# EAGLE board VKeyVoltageKeypad-Panel-v10 (EAGLE 6.5.0)
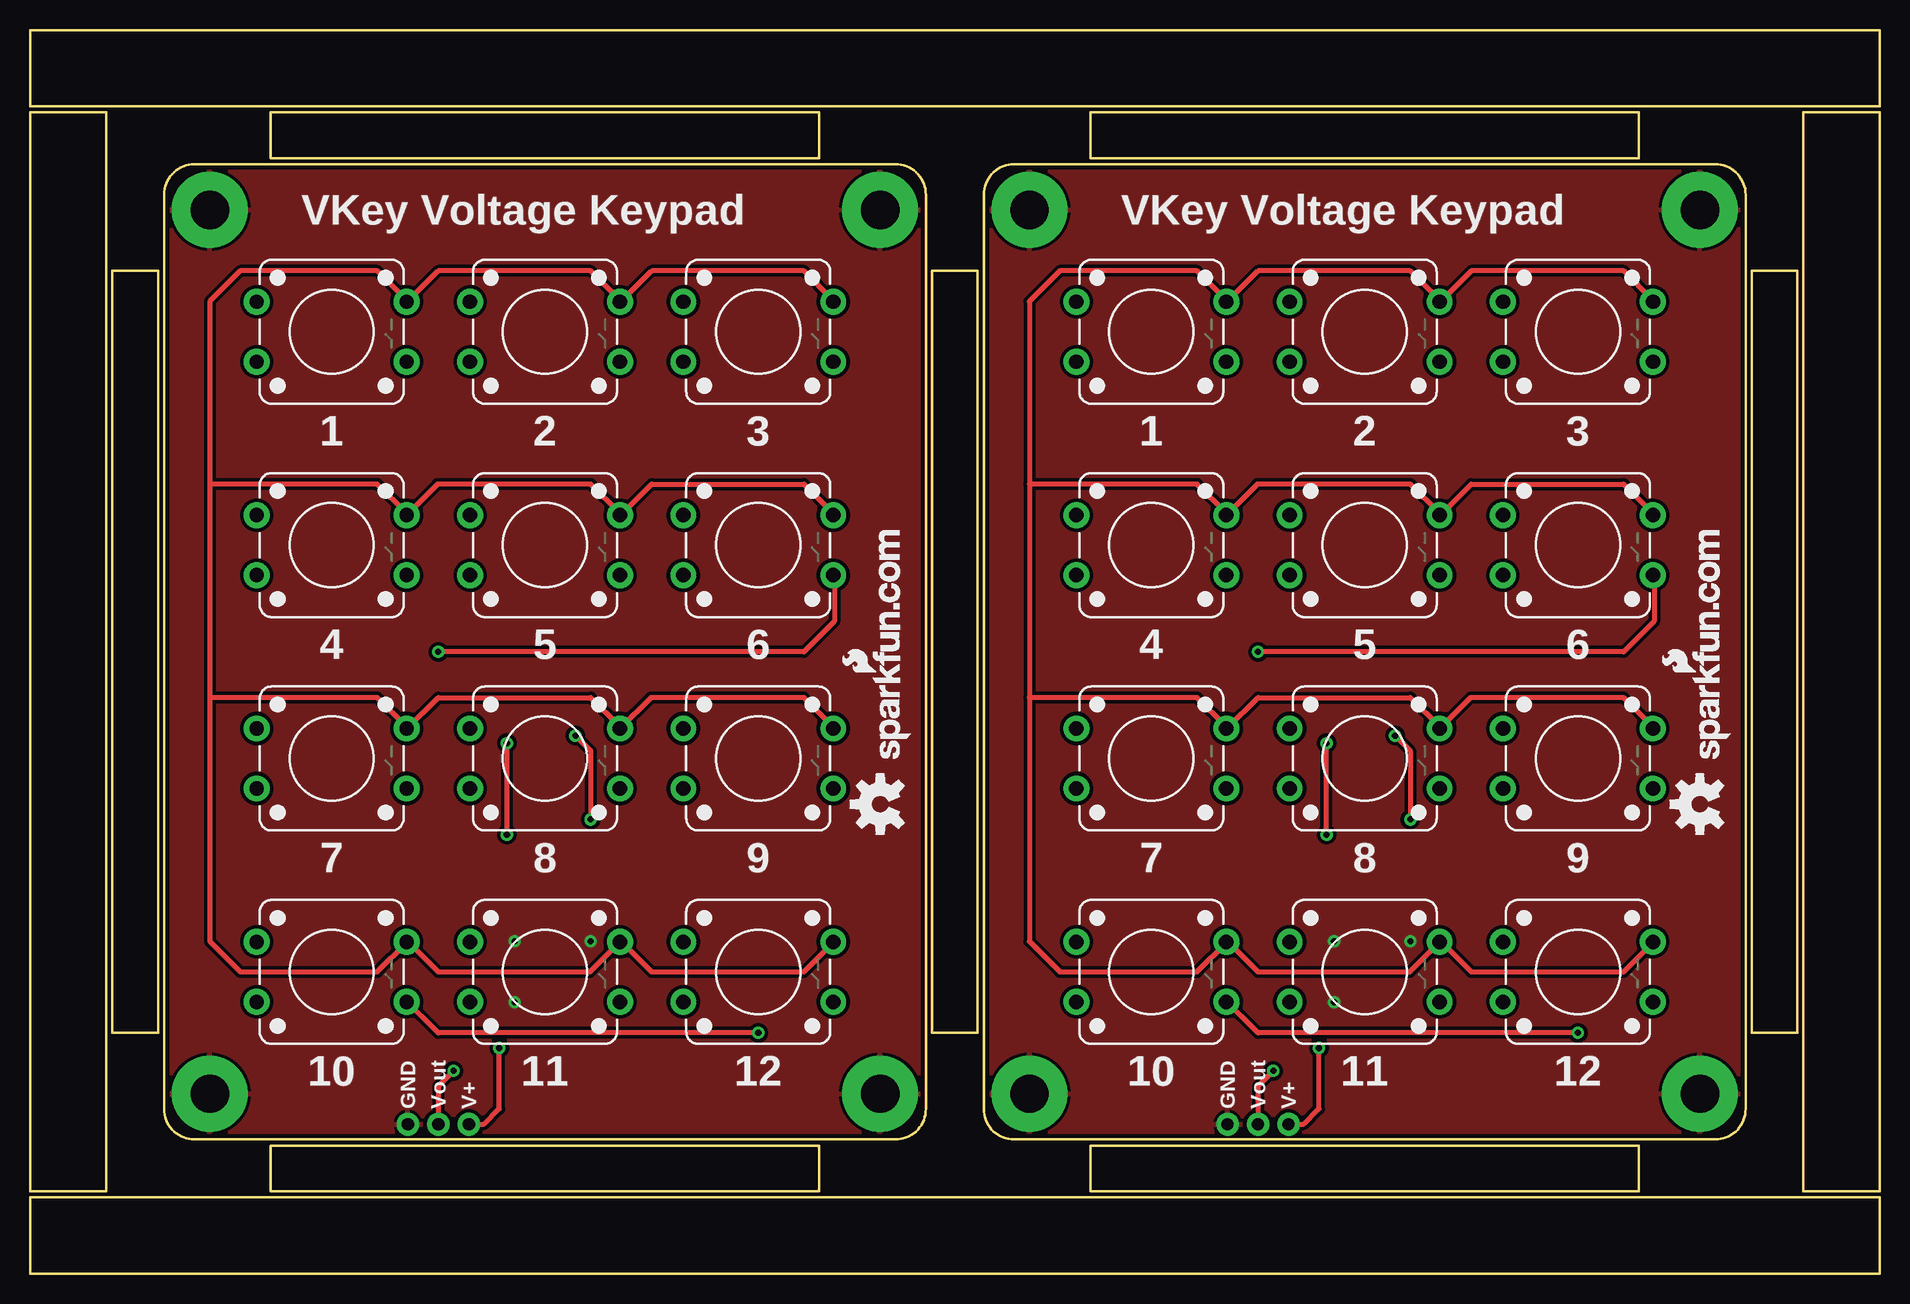
[diagram p0: board, top side]
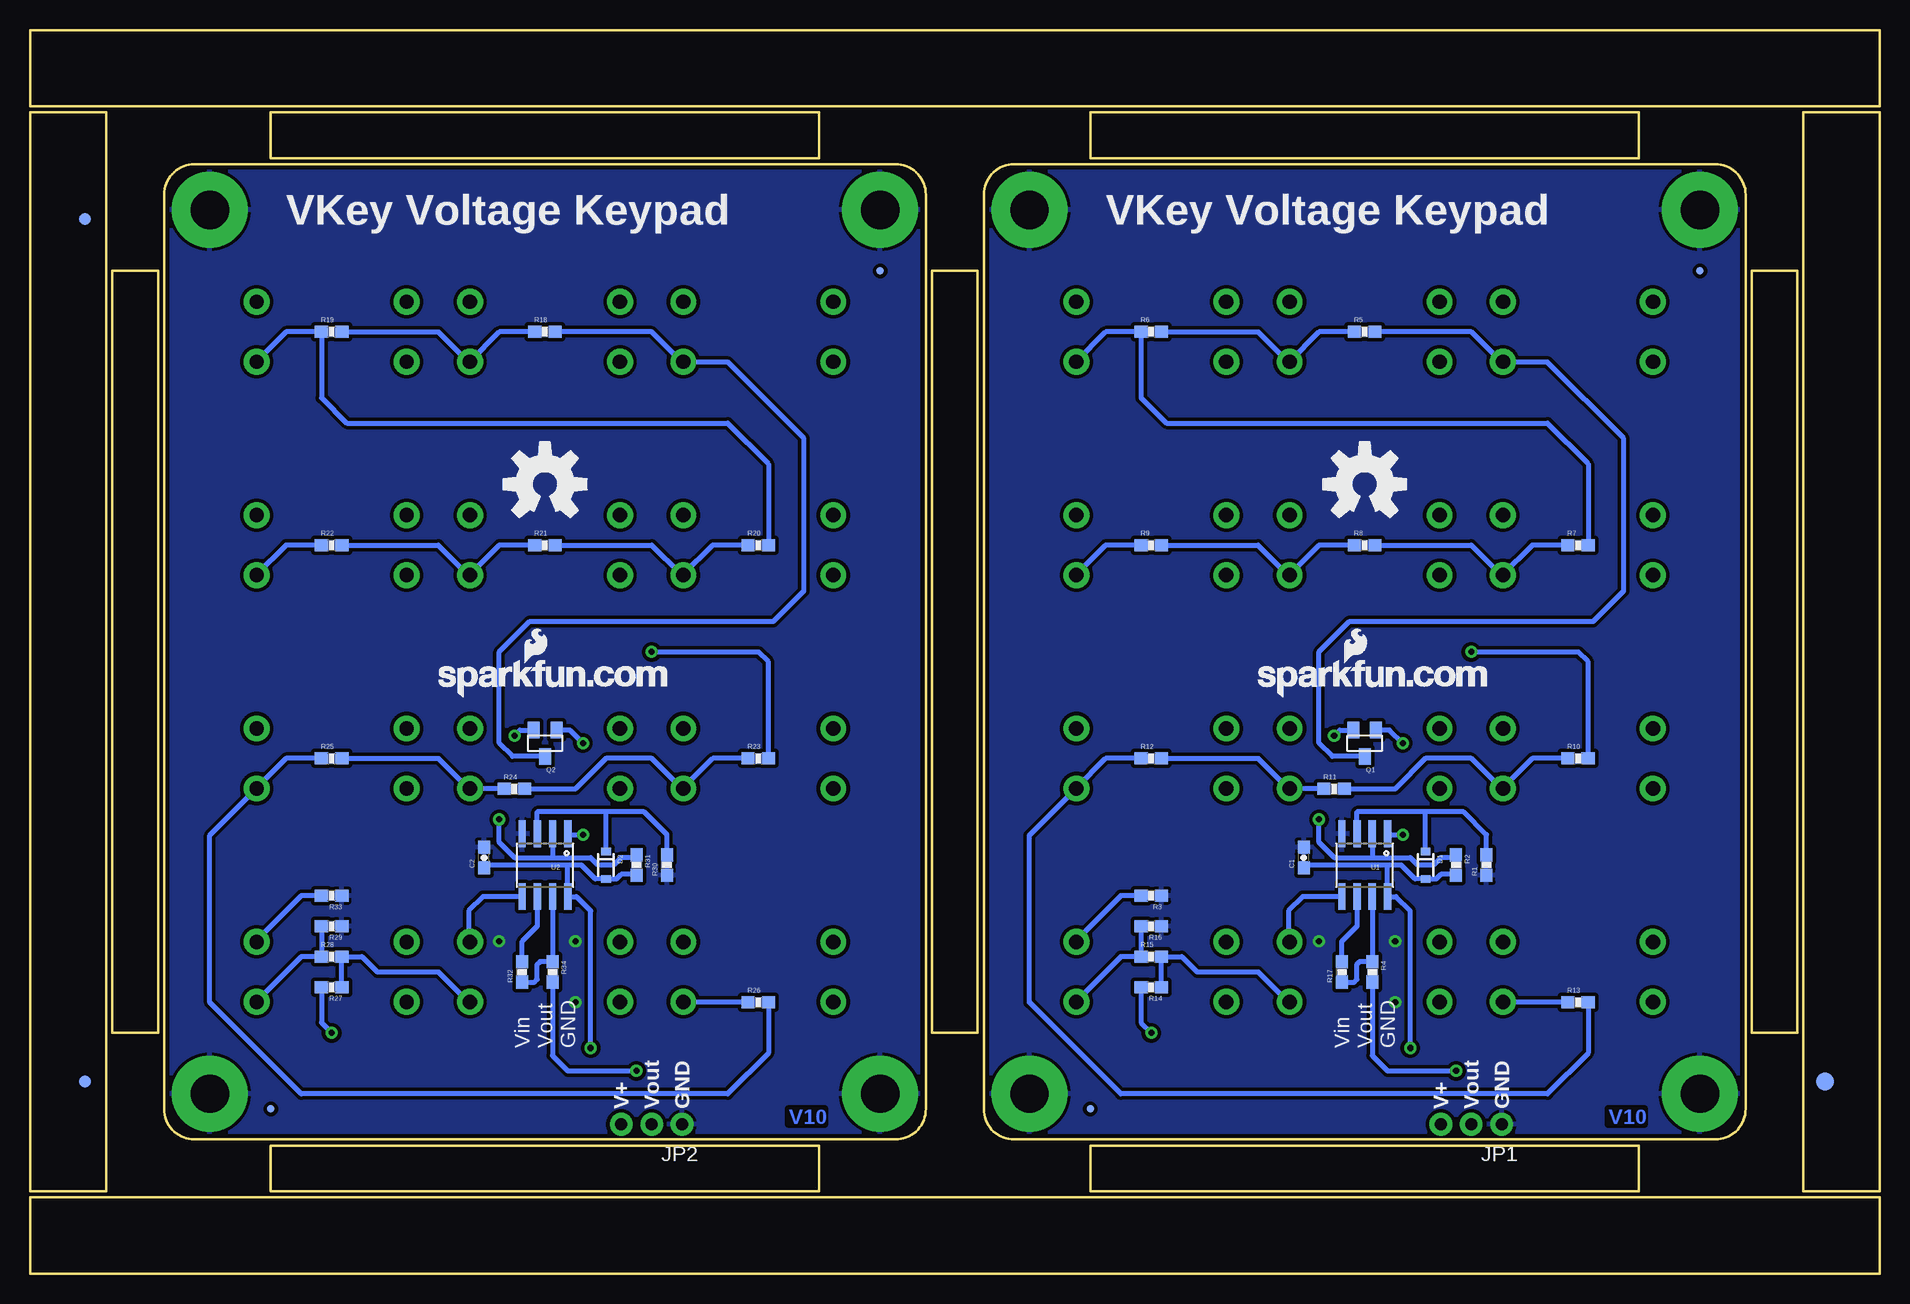
[diagram p1: board, bottom side, seen from below]

Size 154.18 x 103.63 mm. Coordinates in mm from the lower left corner, seen from the top.
Outline: 6.35,79.25 6.35,6.86 0,6.86 0,29.72
Outline: 154.18,79.25 154.18,6.86 147.83,6.86 147.83,29.72
Outline: 147.83,24.38 147.83,96.77 154.18,96.77 154.18,73.91
Outline: 0,24.38 0,96.77 6.35,96.77 6.35,73.91
Outline: 10.67,20.07 10.67,83.57 6.86,83.57 6.86,20.07 10.67,20.07
Outline: 65.79,10.67 20.07,10.67 20.07,6.86 65.79,6.86 65.79,10.67
Outline: 65.79,96.77 20.07,96.77 20.07,92.96 65.79,92.96 65.79,96.77
Outline: 78.99,20.07 78.99,83.57 75.18,83.57 75.18,20.07 78.99,20.07
Outline: 147.32,20.07 147.32,83.57 143.51,83.57 143.51,20.07 147.32,20.07
Outline: 134.11,10.67 88.39,10.67 88.39,6.86 134.11,6.86 134.11,10.67
Outline: 134.11,96.77 88.39,96.77 88.39,92.96 134.11,92.96 134.11,96.77
Outline: 0,6.35 0,0 154.18,0 154.18,6.35 0,6.35
Outline: 154.18,97.28 154.18,103.63 0,103.63 0,97.28 154.18,97.28
Outline: 11.18,89.92 11.18,13.72 arc90 13.72,11.18 72.14,11.18 arc90 74.68,13.72 74.68,89.92 arc90 72.14,92.46 13.72,92.46 arc90 11.18,89.92
Outline: 79.5,89.92 79.5,13.72 arc90 82.04,11.18 140.46,11.18 arc90 143,13.72 143,89.92 arc90 140.46,92.46 82.04,92.46 arc90 79.5,89.92
Copper layers (1*16): Top 0.035mm / dielectric 1.5mm / Bottom 0.035mm
Design rules "default": minimum track width 7mil, minimum drill 15mil, track to track 8mil, track to pad 8mil, pad to pad 8mil, via to via 8mil, smd to smd 8mil, copper to edge 8mil, drill to drill 8mil, minimum pad ring 12mil, minimum via ring 10mil, stop-mask expansion 4mil, vias tented up to drill 20mil, thermal gap 10mil

## Footprints (pad centres in the part's own frame; a part is rotated, then mirrored left to right if it is on the bottom)
0603-CAP = smd 1.1 x 1: 1 -0.85,0; 2 0.85,0
SOD-323 = smd 0.63 x 0.83: 1 -1.15,0; 2 1.15,0
FIDUCIAL-1.5X3 = smd 1.5 x 1.5: 1 0,0
FIDUCIAL-1X2.5 = smd 1 x 1: 1 0,0
MICRO-FIDUCIAL = smd 0.635 x 0.635: 1 0,0
1X03_NO_SILK = drill 1.016 pad 1.88: 1 0,0; 2 2.54,0; 3 5.08,0
SOT23 = smd 1 x 1.4: 1 -0.95,-1.1; 2 0.95,-1.1; 3 0,1.1
0603-RES = smd 1.1 x 1: 1 -0.85,0; 2 0.85,0
TACTILE-PTH-12MM = drill 1.2 pad 2.159: 1 6.25,-2.5; 2 -6.25,-2.5; 3 6.25,2.5; 4 -6.25,2.5
STANDOFF-ELECTRICAL = drill 3.2 pad 6.35: P1 0,0
SO08 = smd 0.61 x 2.21: 1 -1.905,-2.616; 2 -0.635,-2.616; 3 0.635,-2.616; 4 1.905,-2.616; 5 1.905,2.616; 6 0.635,2.616; 7 -0.635,2.616; 8 -1.905,2.616

## Placement (x,y rotation side)
C1  .01uF  [0603-CAP]  48.01,34.67 90 bottom
C2  .01uF  [0603-CAP]  116.33,34.67 90 bottom
D1  BAS16  [SOD-323]  37.85,34.04 270 bottom
D2  BAS16  [SOD-323]  106.17,34.04 270 bottom
E$1  [FIDUCIAL-1.5X3]  4.57,16 0 bottom
E$2  [FIDUCIAL-1X2.5]  149.61,16 0 bottom
E$3  [FIDUCIAL-1X2.5]  149.61,87.88 0 bottom
FID1  FIDUCIALUFIDUCIAL  [MICRO-FIDUCIAL]  65.79,13.72 0 bottom
FID2  FIDUCIALUFIDUCIAL  [MICRO-FIDUCIAL]  14.99,83.57 0 bottom
FID3  FIDUCIALUFIDUCIAL  [MICRO-FIDUCIAL]  134.11,13.72 0 bottom
FID4  FIDUCIALUFIDUCIAL  [MICRO-FIDUCIAL]  83.31,83.57 0 bottom
JP1  POWER & OUTPUT  [1X03_NO_SILK]  31.5,12.45 180 bottom
JP2  POWER & OUTPUT  [1X03_NO_SILK]  99.82,12.45 180 bottom
LOGO1  LOGO-SFENEW  [SFE-NEW-WEBLOGO]  73.41,42.93 90 top
LOGO2  LOGO-SFENEW  [SFE-NEW-WEBLOGO]  51.82,48.01 0 bottom
LOGO3  OSHW-LOGOM  [OSHW-LOGO-M]  70.87,39.12 90 top
LOGO4  OSHW-LOGOL  [OSHW-LOGO-L]  42.93,65.79 0 bottom
LOGO5  LOGO-SFENEW  [SFE-NEW-WEBLOGO]  141.73,42.93 90 top
LOGO6  LOGO-SFENEW  [SFE-NEW-WEBLOGO]  120.14,48.01 0 bottom
LOGO7  OSHW-LOGOM  [OSHW-LOGO-M]  139.19,39.12 90 top
LOGO8  OSHW-LOGOL  [OSHW-LOGO-L]  111.25,65.79 0 bottom
Q1  MMBT3906  [SOT23]  42.93,44.2 180 bottom
Q2  MMBT3906  [SOT23]  111.25,44.2 180 bottom
R1  10k  [0603-RES]  32.77,34.04 90 bottom
R2  1k  [0603-RES]  35.31,34.04 270 bottom
R3  1meg  [0603-RES]  60.71,31.5 180 bottom
R4  100  [0603-RES]  42.29,25.15 270 bottom
R5  330  [0603-RES]  42.93,78.49 0 bottom
R6  330  [0603-RES]  60.71,78.49 0 bottom
R7  330  [0603-RES]  25.15,60.71 0 bottom
R8  330  [0603-RES]  42.93,60.71 0 bottom
R9  330  [0603-RES]  60.71,60.71 0 bottom
R10  330  [0603-RES]  25.15,42.93 0 bottom
R11  330  [0603-RES]  45.47,40.39 0 bottom
R12  330  [0603-RES]  60.71,42.93 0 bottom
R13  330  [0603-RES]  25.15,22.61 0 bottom
R14  330  [0603-RES]  60.71,23.88 180 bottom
R15  330  [0603-RES]  60.71,26.42 0 bottom
R16  330  [0603-RES]  60.71,28.96 180 bottom
R17  1k  [0603-RES]  44.83,25.15 90 bottom
R18  330  [0603-RES]  111.25,78.49 0 bottom
R19  330  [0603-RES]  129.03,78.49 0 bottom
R20  330  [0603-RES]  93.47,60.71 0 bottom
R21  330  [0603-RES]  111.25,60.71 0 bottom
R22  330  [0603-RES]  129.03,60.71 0 bottom
R23  330  [0603-RES]  93.47,42.93 0 bottom
R24  330  [0603-RES]  113.79,40.39 0 bottom
R25  330  [0603-RES]  129.03,42.93 0 bottom
R26  330  [0603-RES]  93.47,22.61 0 bottom
R27  330  [0603-RES]  129.03,23.88 180 bottom
R28  330  [0603-RES]  129.03,26.42 0 bottom
R29  330  [0603-RES]  129.03,28.96 180 bottom
R30  10k  [0603-RES]  101.09,34.04 90 bottom
R31  1k  [0603-RES]  103.63,34.04 270 bottom
R32  1k  [0603-RES]  113.16,25.15 90 bottom
R33  1meg  [0603-RES]  129.03,31.5 180 bottom
R34  100  [0603-RES]  110.62,25.15 270 bottom
S1  SWITCH-MOMENTARY-212MM  [TACTILE-PTH-12MM]  25.15,78.49 0 top
S2  SWITCH-MOMENTARY-212MM  [TACTILE-PTH-12MM]  42.93,78.49 0 top
S3  SWITCH-MOMENTARY-212MM  [TACTILE-PTH-12MM]  60.71,78.49 0 top
S4  SWITCH-MOMENTARY-212MM  [TACTILE-PTH-12MM]  25.15,60.71 0 top
S5  SWITCH-MOMENTARY-212MM  [TACTILE-PTH-12MM]  42.93,60.71 0 top
S6  SWITCH-MOMENTARY-212MM  [TACTILE-PTH-12MM]  60.71,60.71 0 top
S7  SWITCH-MOMENTARY-212MM  [TACTILE-PTH-12MM]  25.15,42.93 0 top
S8  SWITCH-MOMENTARY-212MM  [TACTILE-PTH-12MM]  42.93,42.93 0 top
S9  SWITCH-MOMENTARY-212MM  [TACTILE-PTH-12MM]  60.71,42.93 0 top
S10  SWITCH-MOMENTARY-212MM  [TACTILE-PTH-12MM]  25.15,25.15 0 top
S11  SWITCH-MOMENTARY-212MM  [TACTILE-PTH-12MM]  42.93,25.15 0 top
S12  SWITCH-MOMENTARY-212MM  [TACTILE-PTH-12MM]  60.71,25.15 0 top
S13  STANDOFF_ELECTRICAL  [STANDOFF-ELECTRICAL]  70.87,88.65 0 top
S14  STANDOFF_ELECTRICAL  [STANDOFF-ELECTRICAL]  70.87,14.99 0 top
S15  STANDOFF_ELECTRICAL  [STANDOFF-ELECTRICAL]  14.99,14.99 0 top
S16  STANDOFF_ELECTRICAL  [STANDOFF-ELECTRICAL]  14.99,88.65 0 top
S17  SWITCH-MOMENTARY-212MM  [TACTILE-PTH-12MM]  93.47,78.49 0 top
S18  SWITCH-MOMENTARY-212MM  [TACTILE-PTH-12MM]  111.25,78.49 0 top
S19  SWITCH-MOMENTARY-212MM  [TACTILE-PTH-12MM]  129.03,78.49 0 top
S20  SWITCH-MOMENTARY-212MM  [TACTILE-PTH-12MM]  93.47,60.71 0 top
S21  SWITCH-MOMENTARY-212MM  [TACTILE-PTH-12MM]  111.25,60.71 0 top
S22  SWITCH-MOMENTARY-212MM  [TACTILE-PTH-12MM]  129.03,60.71 0 top
S23  SWITCH-MOMENTARY-212MM  [TACTILE-PTH-12MM]  93.47,42.93 0 top
S24  SWITCH-MOMENTARY-212MM  [TACTILE-PTH-12MM]  111.25,42.93 0 top
S25  SWITCH-MOMENTARY-212MM  [TACTILE-PTH-12MM]  129.03,42.93 0 top
S26  SWITCH-MOMENTARY-212MM  [TACTILE-PTH-12MM]  93.47,25.15 0 top
S27  SWITCH-MOMENTARY-212MM  [TACTILE-PTH-12MM]  111.25,25.15 0 top
S28  SWITCH-MOMENTARY-212MM  [TACTILE-PTH-12MM]  129.03,25.15 0 top
S29  STANDOFF_ELECTRICAL  [STANDOFF-ELECTRICAL]  139.19,88.65 0 top
S30  STANDOFF_ELECTRICAL  [STANDOFF-ELECTRICAL]  139.19,14.99 0 top
S31  STANDOFF_ELECTRICAL  [STANDOFF-ELECTRICAL]  83.31,14.99 0 top
S32  STANDOFF_ELECTRICAL  [STANDOFF-ELECTRICAL]  83.31,88.65 0 top
U1  LMV358  [SO08]  42.93,34.04 180 bottom
U2  LMV358  [SO08]  111.25,34.04 180 bottom

## Library data of the parts
C1 C2 = SparkFun-Capacitors; PROD_ID: CAP-00867; VALUE: 10nF
D1 D2 = SparkFun-DiscreteSemi; PROD_ID: DIO-09646
E$1-E$3 FID1-FID4 LOGO1-LOGO8 = SparkFun-Aesthetics
JP1 JP2 = SparkFun-Connectors
Q1 Q2 = SparkFun-DiscreteSemi; PROD_ID: TRANS-08052
R1 R30 = SparkFun-Resistors; PROD_ID: RES-00824; VALUE: 10K
R2 R17 R31 R32 = SparkFun-Resistors; PROD_ID: RES-07856; VALUE: 1K
R3 R33 = SparkFun-Resistors; PROD_ID: RES-07868; VALUE: 1M
R4 R34 = SparkFun-Resistors; PROD_ID: RES-07863
R5-R16 R18-R29 = SparkFun-Resistors; PROD_ID: RES-00818
S1-S12 S17-S28 = SparkFun-Electromechanical; PROD_ID: SWCH-09185
S13-S16 S29-S32 = SparkFun-Electromechanical
U1 U2 = SparkFun-AnalogIC; PROD_ID: IC-09657

## Nets
5V: C1.1 D1.2 JP1.3 R2.2 U1.8
5V1: C2.1 D2.2 JP2.3 R31.2 U2.8
GND: C1.2 JP1.1 R1.1 R3.1 R16.1 S13.P1 S14.P1 S15.P1 S16.P1 U1.4
GND1: C2.2 JP2.1 R29.1 R30.1 R33.1 S29.P1 S30.P1 S31.P1 S32.P1 U2.4
N$1: D1.1 R1.2 U1.3
N$2: Q1.1 U1.1
N$3: R3.2 S1.3 S2.3 S3.3 S4.3 S5.3 S6.3 S7.3 S8.3 S9.3 S10.3 S11.3 S12.3 U1.5
N$4: R14.1 R15.2 S11.1
N$5: Q1.2 R2.1 U1.2
N$6: Q1.3 R5.2 S1.1
N$7: R5.1 R6.2 S2.1
N$8: R6.1 R7.2 S3.1
N$9: R7.1 R8.2 S4.1
N$10: R8.1 R9.2 S5.1
N$11: R9.1 R10.2 S6.1
N$12: R10.1 R11.2 S7.1
N$13: R11.1 R12.2 S8.1
N$14: R12.1 R13.2 S9.1
N$15: R13.1 R14.2 S10.1
N$16: R15.1 R16.2 S12.1
N$17: R4.1 R17.1 U1.7
N$18: R17.2 U1.6
N$19: D2.1 R30.2 U2.3
N$20: Q2.2 R31.1 U2.2
N$21: Q2.3 R18.2 S17.1
N$22: R18.1 R19.2 S18.1
N$23: R19.1 R20.2 S19.1
N$24: R20.1 R21.2 S20.1
N$25: R21.1 R22.2 S21.1
N$26: R22.1 R23.2 S22.1
N$27: R24.1 R25.2 S24.1
N$28: R25.1 R26.2 S25.1
N$29: R26.1 R27.2 S26.1
N$30: R28.1 R29.2 S28.1
N$31: R27.1 R28.2 S27.1
N$32: Q2.1 U2.1
N$33: R33.2 S17.3 S18.3 S19.3 S20.3 S21.3 S22.3 S23.3 S24.3 S25.3 S26.3 S27.3 S28.3 U2.5
N$34: R23.1 R24.2 S23.1
N$35: R32.1 R34.1 U2.7
N$36: R32.2 U2.6
VOUT: JP1.2 R4.2
VOUT1: JP2.2 R34.2

## Tracks (layer width: path | path; a pad name or v marks a point on that pad's centre or on a via)
5V  (via drill 0.51)
  Top 0.406: JP1.3 37.85,12.45 39.12,13.72 v39.12,18.8
  Bottom 0.406: 41.02,34.04 47.79,34.04 C1.1 | v39.12,18.8 39.12,30.23 40.31,31.42 U1.8 41.02,34.04 | 41.02,34.04 39.88,34.04 38.73,32.89 D1.2 36.96,32.89 36.58,33.27 36.57,33.27 35.39,33.27 R2.2
5V1  (via drill 0.51)
  Top 0.406: JP2.3 106.17,12.45 107.44,13.72 v107.44,18.8
  Bottom 0.406: 109.35,34.04 116.12,34.04 C2.1 | v107.44,18.8 107.44,30.23 108.64,31.42 U2.8 109.35,34.04 | 109.35,34.04 108.2,34.04 107.05,32.89 D2.2 105.29,32.89 104.9,33.27 104.89,33.27 103.71,33.27 R31.2
GND  (via drill 0.51)
  other vias: 46.74,27.69 40.39,27.69 40.39,22.61
  pour Bottom (isolate 0.305): 71.35,11.81 14.51,11.81 arc-90 11.81,14.51 11.81,89.13 arc-90 14.51,91.82 71.35,91.82 arc-90 74.04,89.13 74.04,14.51 arc-90
  pour Top (isolate 0.305): 71.35,11.81 14.51,11.81 arc-90 11.81,14.51 11.81,89.13 arc-90 14.51,91.82 71.35,91.82 arc-90 74.04,89.13 74.04,14.51 arc-90
GND1  (via drill 0.51)
  other vias: 115.06,27.69 108.71,27.69 108.71,22.61
  pour Bottom (isolate 0.305): 139.67,11.81 82.83,11.81 arc-90 80.14,14.51 80.14,89.13 arc-90 82.83,91.82 139.67,91.82 arc-90 142.37,89.13 142.37,14.51 arc-90
  pour Top (isolate 0.305): 139.67,11.81 82.83,11.81 arc-90 80.14,14.51 80.14,89.13 arc-90 82.83,91.82 139.67,91.82 arc-90 142.37,89.13 142.37,14.51 arc-90
N$1
  Bottom 0.406: 37.85,38.48 34.67,38.48 32.77,36.58 R1.2 | 37.85,38.48 43.56,38.48 U1.3 | D1.1 37.85,38.48
N$2  (via drill 0.51)
  Top 0.406: v39.75,36.58 v39.75,44.2
  Bottom 0.406: v39.75,44.2 40.85,45.3 Q1.1 | U1.1 40.95,36.58 v39.75,36.58
N$3
  Top 0.406: S1.3 31.46,80.99 31.46,81.07 | 66.96,80.93 S3.3 66.96,81.13 64.52,83.57 51.82,83.57 49.24,80.99 S2.3 49.18,81.13 46.74,83.57 34.04,83.57 31.54,81.07 31.46,81.07 | S8.3 49.18,45.37 | 67.1,63.21 S6.3 66.96,63.35 64.52,65.79 51.82,65.79 49.24,63.21 S5.3 49.18,63.35 46.74,65.79 33.98,65.79 S4.3 31.4,63.35 28.96,65.79 14.99,65.79 | S8.3 49.18,45.57 46.74,48.01 34.04,48.01 31.46,45.43 S7.3 31.4,45.57 28.96,48.01 14.99,48.01 | 31.46,81.07 28.96,83.57 17.53,83.57 14.99,81.03 14.99,65.79 | 14.99,65.79 14.99,48.01 | 14.99,48.01 14.99,27.69 17.53,25.15 28.96,25.15 31.4,27.59 S10.3 31.4,27.79 34.04,25.15 46.68,25.15 S11.3 49.18,27.79 51.82,25.15 64.52,25.15 66.96,27.59 S12.3 | S9.3 66.96,45.57 64.52,48.01 51.76,48.01 S8.3
  Bottom 0.406: S11.3 49.28,27.75 49.28,30.23 48.08,31.42 U1.5 | S12.3 66.96,27.79 63.25,31.5 R3.2
N$4
  Bottom 0.406: S11.1 49.32,22.65 51.82,25.15 56.9,25.15 58.17,26.42 R15.2 R14.1
N$5  (via drill 0.51)
  Top 0.406: v45.47,44.83 46.74,43.56 v46.74,37.85
  Bottom 0.406: v45.47,44.83 45,45.3 Q1.2 | 42.29,34.67 45.47,34.67 46.74,35.94 v46.74,37.85 | R2.1 35.52,34.67 36.58,34.67 37.21,34.04 38.48,34.04 39.12,34.67 42.29,34.67 | U1.2 42.29,34.67
N$6
  Bottom 0.406: R5.2 34.04,78.49 31.54,75.99 S1.1 27.73,75.99 21.34,69.6 21.34,56.9 23.88,54.36 44.2,54.36 46.74,51.82 46.74,44.2 45.64,43.1 Q1.3
N$7
  Bottom 0.406: R5.1 46.74,78.49 49.18,76.05 | S2.1 49.18,76.05 | 49.18,76.05 49.38,76.05 51.82,78.49 R6.2
N$8
  Bottom 0.406: S3.1 66.96,76.05 64.52,78.49 R6.1 61.56,72.99 59.44,70.87 27.69,70.87 24.3,67.48 R7.2
N$9
  Bottom 0.406: S4.1 31.4,58.27 | 31.4,58.27 28.96,60.71 R7.1 | 31.4,58.27 31.6,58.27 34.04,60.71 R8.2
N$10
  Bottom 0.406: R8.1 46.74,60.71 49.18,58.27 S5.1 49.32,58.21 51.82,60.71 R9.2
N$11  (via drill 0.51)
  Top 0.406: S6.1 67.06,58.11 67.06,54.36 64.52,51.82 v34.04,51.82
  Bottom 0.406: S6.1 66.96,58.27 64.52,60.71 R9.1 | v34.04,51.82 25.15,51.82 24.3,50.97 R10.2
N$12
  Bottom 0.406: R10.1 28.96,42.93 31.4,40.49 S7.1 31.54,40.43 34.04,42.93 37.85,42.93 40.39,40.39 R11.2
N$13
  Bottom 0.406: R12.2 51.82,42.93 49.32,40.43 S8.1 49.24,40.43 49.28,40.39 R11.1
N$14
  Bottom 0.406: R12.1 64.52,42.93 66.96,40.49 S9.1 70.87,36.52 70.87,22.61 63.25,14.99 27.69,14.99 24.3,18.38 R13.2
N$15  (via drill 0.51)
  Top 0.406: v60.71,20.07 34.04,20.07 32.67,21.44 S10.1
  Bottom 0.406: v60.71,20.07 61.56,20.92 R14.2 | 31.5,22.61 31.46,22.65 S10.1 31.36,22.61 R13.1
N$16
  Bottom 0.406: S12.1 66.96,22.71 63.25,26.42 R15.1 R16.2
N$17
  Bottom 0.406: 44.83,24.26 44.87,24.3 R17.1 43.78,24.3 43.56,24.51 43.56,25.78 43.35,26 R4.1 U1.7
N$18
  Bottom 0.406: R17.2 44.83,27.69 43.56,28.96 U1.6
N$19
  Bottom 0.406: 106.17,38.48 103,38.48 101.09,36.58 R30.2 | 106.17,38.48 111.89,38.48 U2.3 | D2.1 106.17,38.48
N$20  (via drill 0.51)
  Top 0.406: v113.79,44.83 115.06,43.56 v115.06,37.85
  Bottom 0.406: v113.79,44.83 113.33,45.3 Q2.2 | 110.62,34.67 113.79,34.67 115.06,35.94 v115.06,37.85 | R31.1 103.85,34.67 104.9,34.67 105.54,34.04 106.81,34.04 107.44,34.67 110.62,34.67 | U2.2 110.62,34.67
N$21
  Bottom 0.406: R18.2 102.36,78.49 99.86,75.99 S17.1 96.05,75.99 89.66,69.6 89.66,56.9 92.2,54.36 112.52,54.36 115.06,51.82 115.06,44.2 113.96,43.1 Q2.3
N$22
  Bottom 0.406: R18.1 115.06,78.49 117.5,76.05 | S18.1 117.5,76.05 | 117.5,76.05 117.7,76.05 120.14,78.49 R19.2
N$23
  Bottom 0.406: S19.1 135.28,76.05 132.84,78.49 R19.1 129.88,72.99 127.76,70.87 96.01,70.87 92.62,67.48 R20.2
N$24
  Bottom 0.406: S20.1 99.72,58.27 | 99.72,58.27 97.28,60.71 R20.1 | 99.72,58.27 99.92,58.27 102.36,60.71 R21.2
N$25
  Bottom 0.406: R21.1 115.06,60.71 117.5,58.27 S21.1 117.64,58.21 120.14,60.71 R22.2
N$26  (via drill 0.51)
  Top 0.406: S22.1 135.38,58.11 135.38,54.36 132.84,51.82 v102.36,51.82
  Bottom 0.406: S22.1 135.28,58.27 132.84,60.71 R22.1 | v102.36,51.82 93.47,51.82 92.62,50.97 R23.2
N$27
  Bottom 0.406: R25.2 120.14,42.93 117.64,40.43 S24.1 117.56,40.43 117.6,40.39 R24.1
N$28
  Bottom 0.406: R25.1 132.84,42.93 135.28,40.49 S25.1 139.19,36.52 139.19,22.61 131.57,14.99 96.01,14.99 92.62,18.38 R26.2
N$29  (via drill 0.51)
  Top 0.406: v129.03,20.07 102.36,20.07 100.99,21.44 S26.1
  Bottom 0.406: v129.03,20.07 129.88,20.92 R27.2 | 99.82,22.61 99.78,22.65 S26.1 99.68,22.61 R26.1
N$30
  Bottom 0.406: S28.1 135.28,22.71 131.57,26.42 R28.1 R29.2
N$31
  Bottom 0.406: S27.1 117.64,22.65 120.14,25.15 125.22,25.15 126.49,26.42 R28.2 R27.1
N$32  (via drill 0.51)
  Top 0.406: v108.08,36.58 v108.08,44.2
  Bottom 0.406: v108.08,44.2 109.18,45.3 Q2.1 | U2.1 109.27,36.58 v108.08,36.58
N$33
  Top 0.406: S17.3 99.78,80.99 99.78,81.07 | 135.28,80.93 S19.3 135.28,81.13 132.84,83.57 120.14,83.57 117.56,80.99 S18.3 117.5,81.13 115.06,83.57 102.36,83.57 99.86,81.07 99.78,81.07 | S24.3 117.5,45.37 | 135.42,63.21 S22.3 135.28,63.35 132.84,65.79 120.14,65.79 117.56,63.21 S21.3 117.5,63.35 115.06,65.79 102.3,65.79 S20.3 99.72,63.35 97.28,65.79 83.31,65.79 | S24.3 117.5,45.57 115.06,48.01 102.36,48.01 99.78,45.43 S23.3 99.72,45.57 97.28,48.01 83.31,48.01 | 99.78,81.07 97.28,83.57 85.85,83.57 83.31,81.03 83.31,65.79 | 83.31,65.79 83.31,48.01 | 83.31,48.01 83.31,27.69 85.85,25.15 97.28,25.15 99.72,27.59 S26.3 99.72,27.79 102.36,25.15 115,25.15 S27.3 117.5,27.79 120.14,25.15 132.84,25.15 135.28,27.59 S28.3 | S25.3 135.28,45.57 132.84,48.01 120.08,48.01 S24.3
  Bottom 0.406: S27.3 117.6,27.75 117.6,30.23 116.41,31.42 U2.5 | S28.3 135.28,27.79 131.57,31.5 R33.2
N$34
  Bottom 0.406: R23.1 97.28,42.93 99.72,40.49 S23.1 99.86,40.43 102.36,42.93 106.17,42.93 108.71,40.39 R24.2
N$35
  Bottom 0.406: 113.16,24.26 113.2,24.3 R32.1 112.1,24.3 111.89,24.51 111.89,25.78 111.67,26 R34.1 U2.7
N$36
  Bottom 0.406: R32.2 113.16,27.69 111.89,28.96 U2.6
VOUT  (via drill 0.51)
  Top 0.406: v35.31,16.89 34.04,15.62 JP1.2
  Bottom 0.406: R4.2 42.29,18.16 41.02,16.89 v35.31,16.89
VOUT1  (via drill 0.51)
  Top 0.406: v103.63,16.89 102.36,15.62 JP2.2
  Bottom 0.406: R34.2 110.62,18.16 109.35,16.89 v103.63,16.89

## Text on the board
Bottom: V10 | V10
tPlace: VKey Voltage Keypad | VKey Voltage Keypad | 1 | 2 | 3 | 1 | 2 | 3 | 4 | 5 | 6 | 4 | 5 | 6 | 7 | 8 | 9 | 7 | 8 | 9 | 10 | 11 | 12 | 10 | 11 | 12 | GND | Vout | V+ | GND | Vout | V+
bPlace: VKey Voltage Keypad | VKey Voltage Keypad | GND | Vout | V+ | GND | Vout | V+
bNames: GND | Vout | Vin | GND | Vout | Vin